# Allegro board SMA_fabB_v1_040718.brd
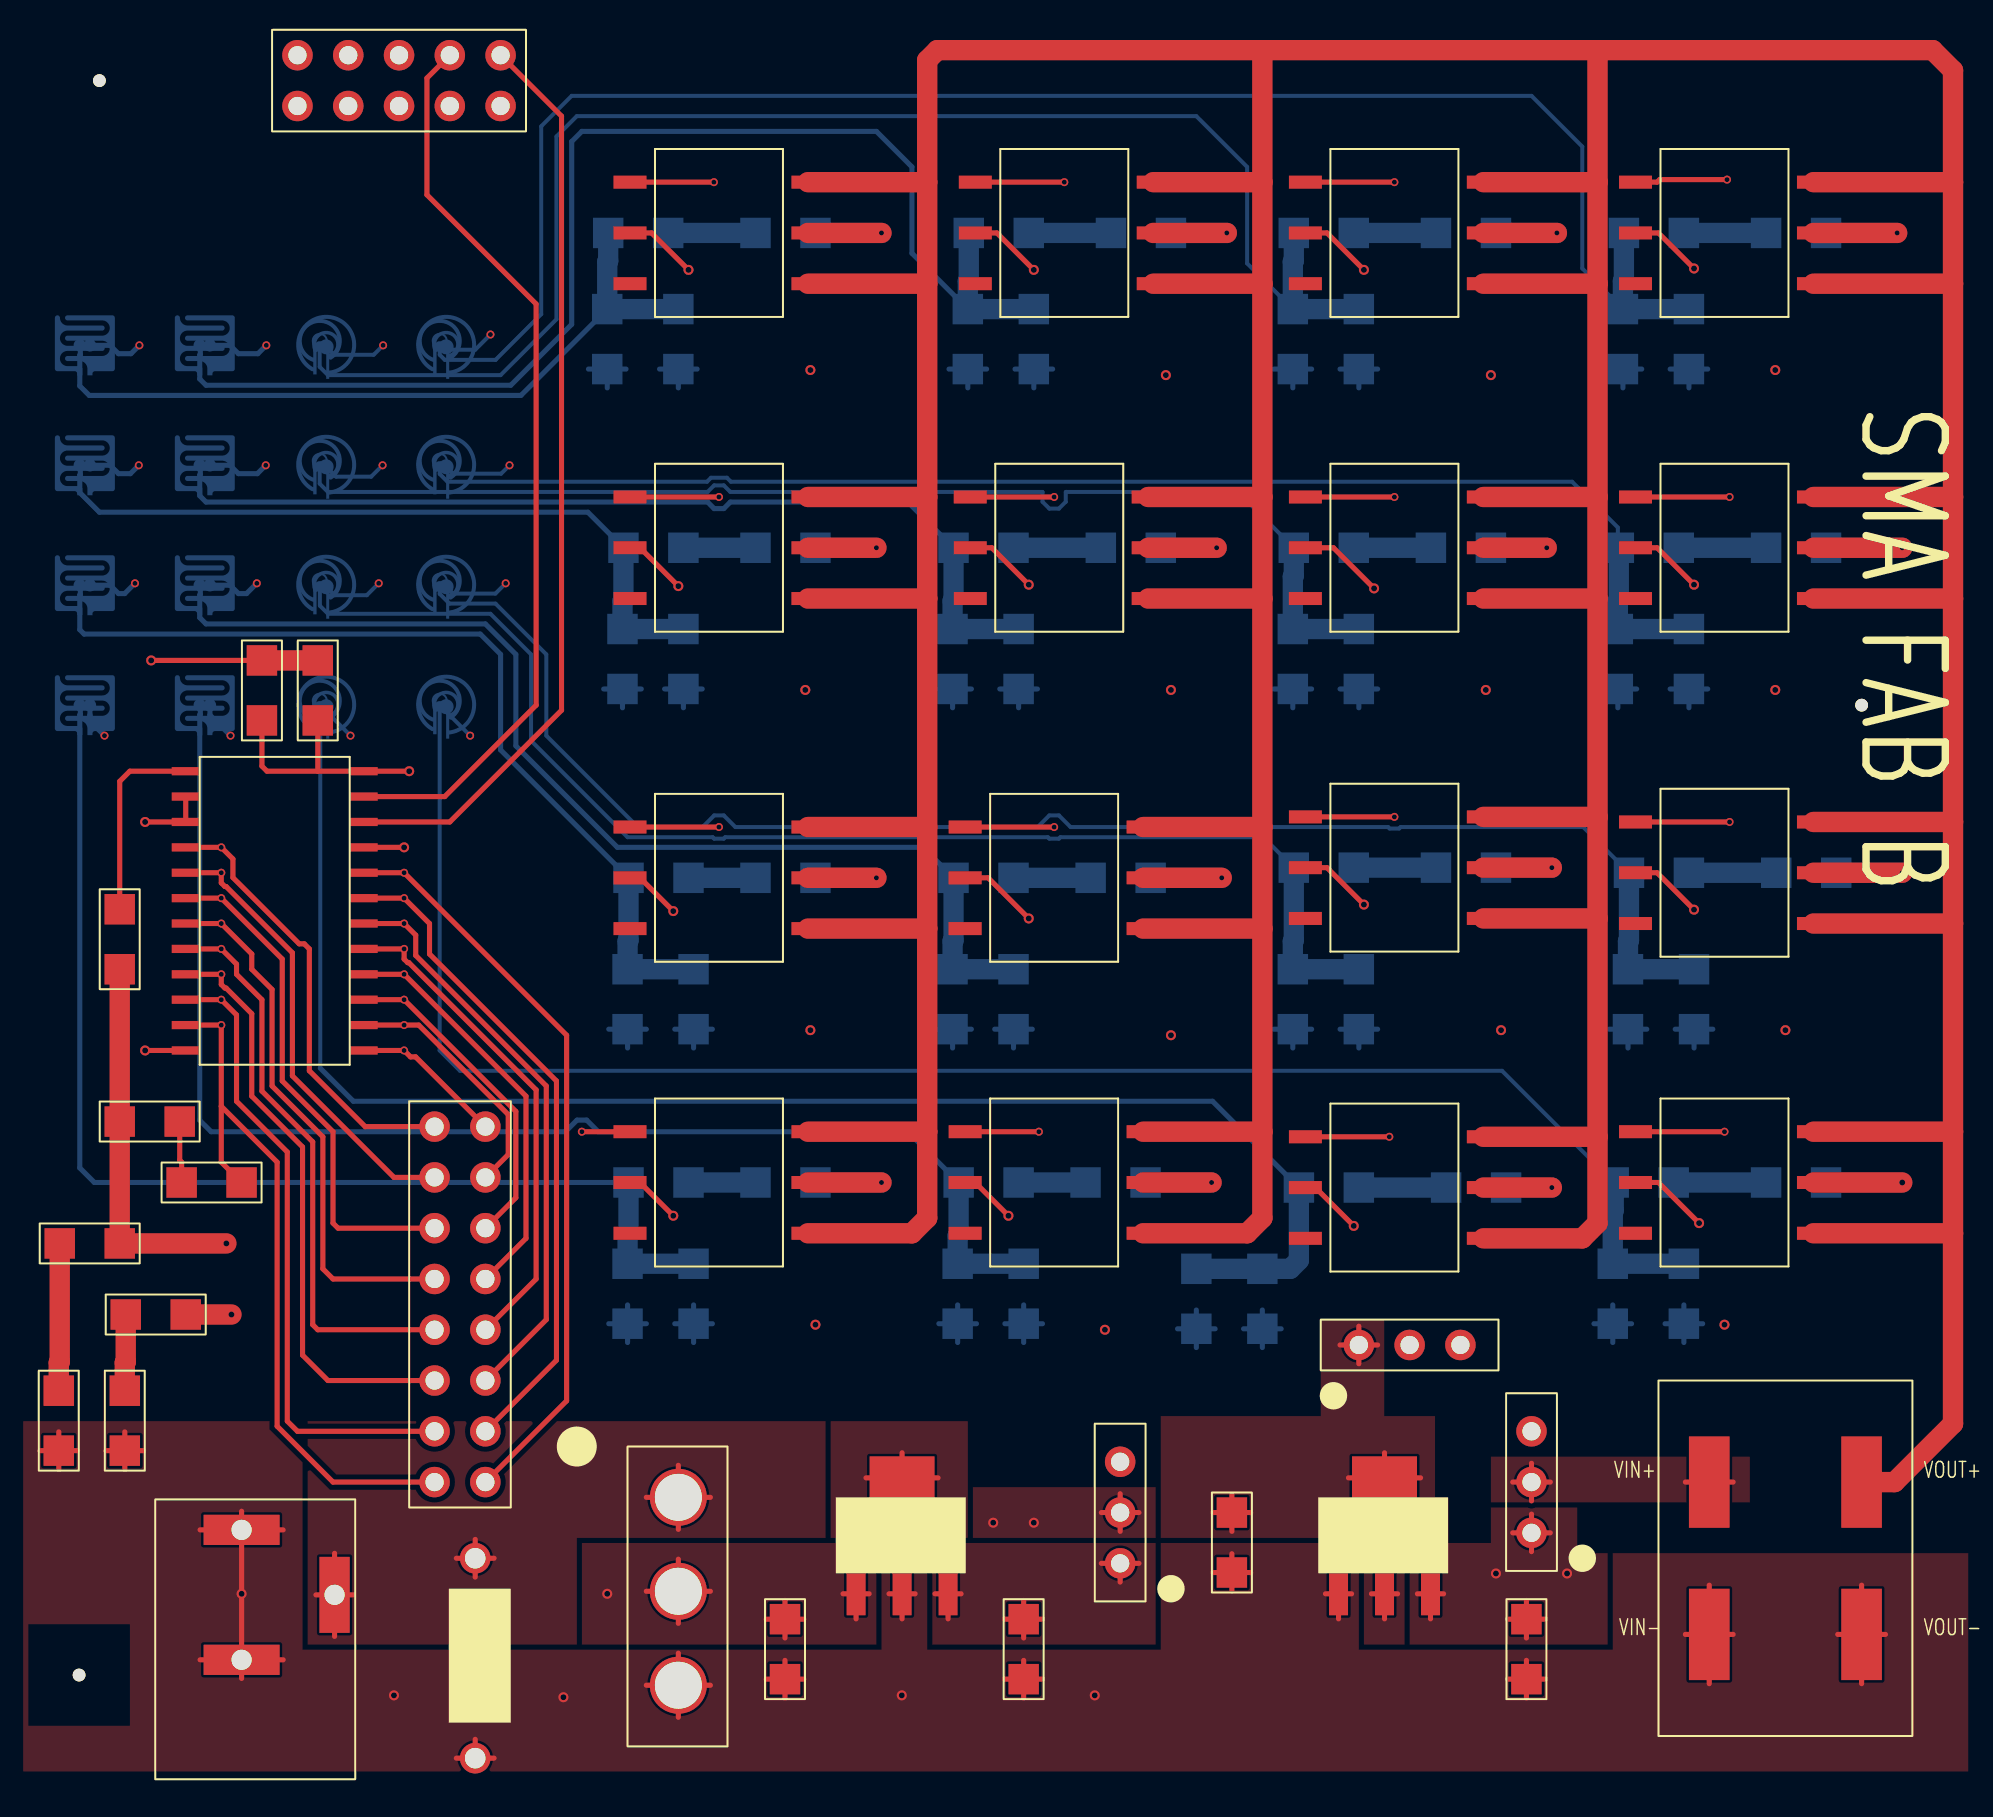
[diagram p0: board, top side]
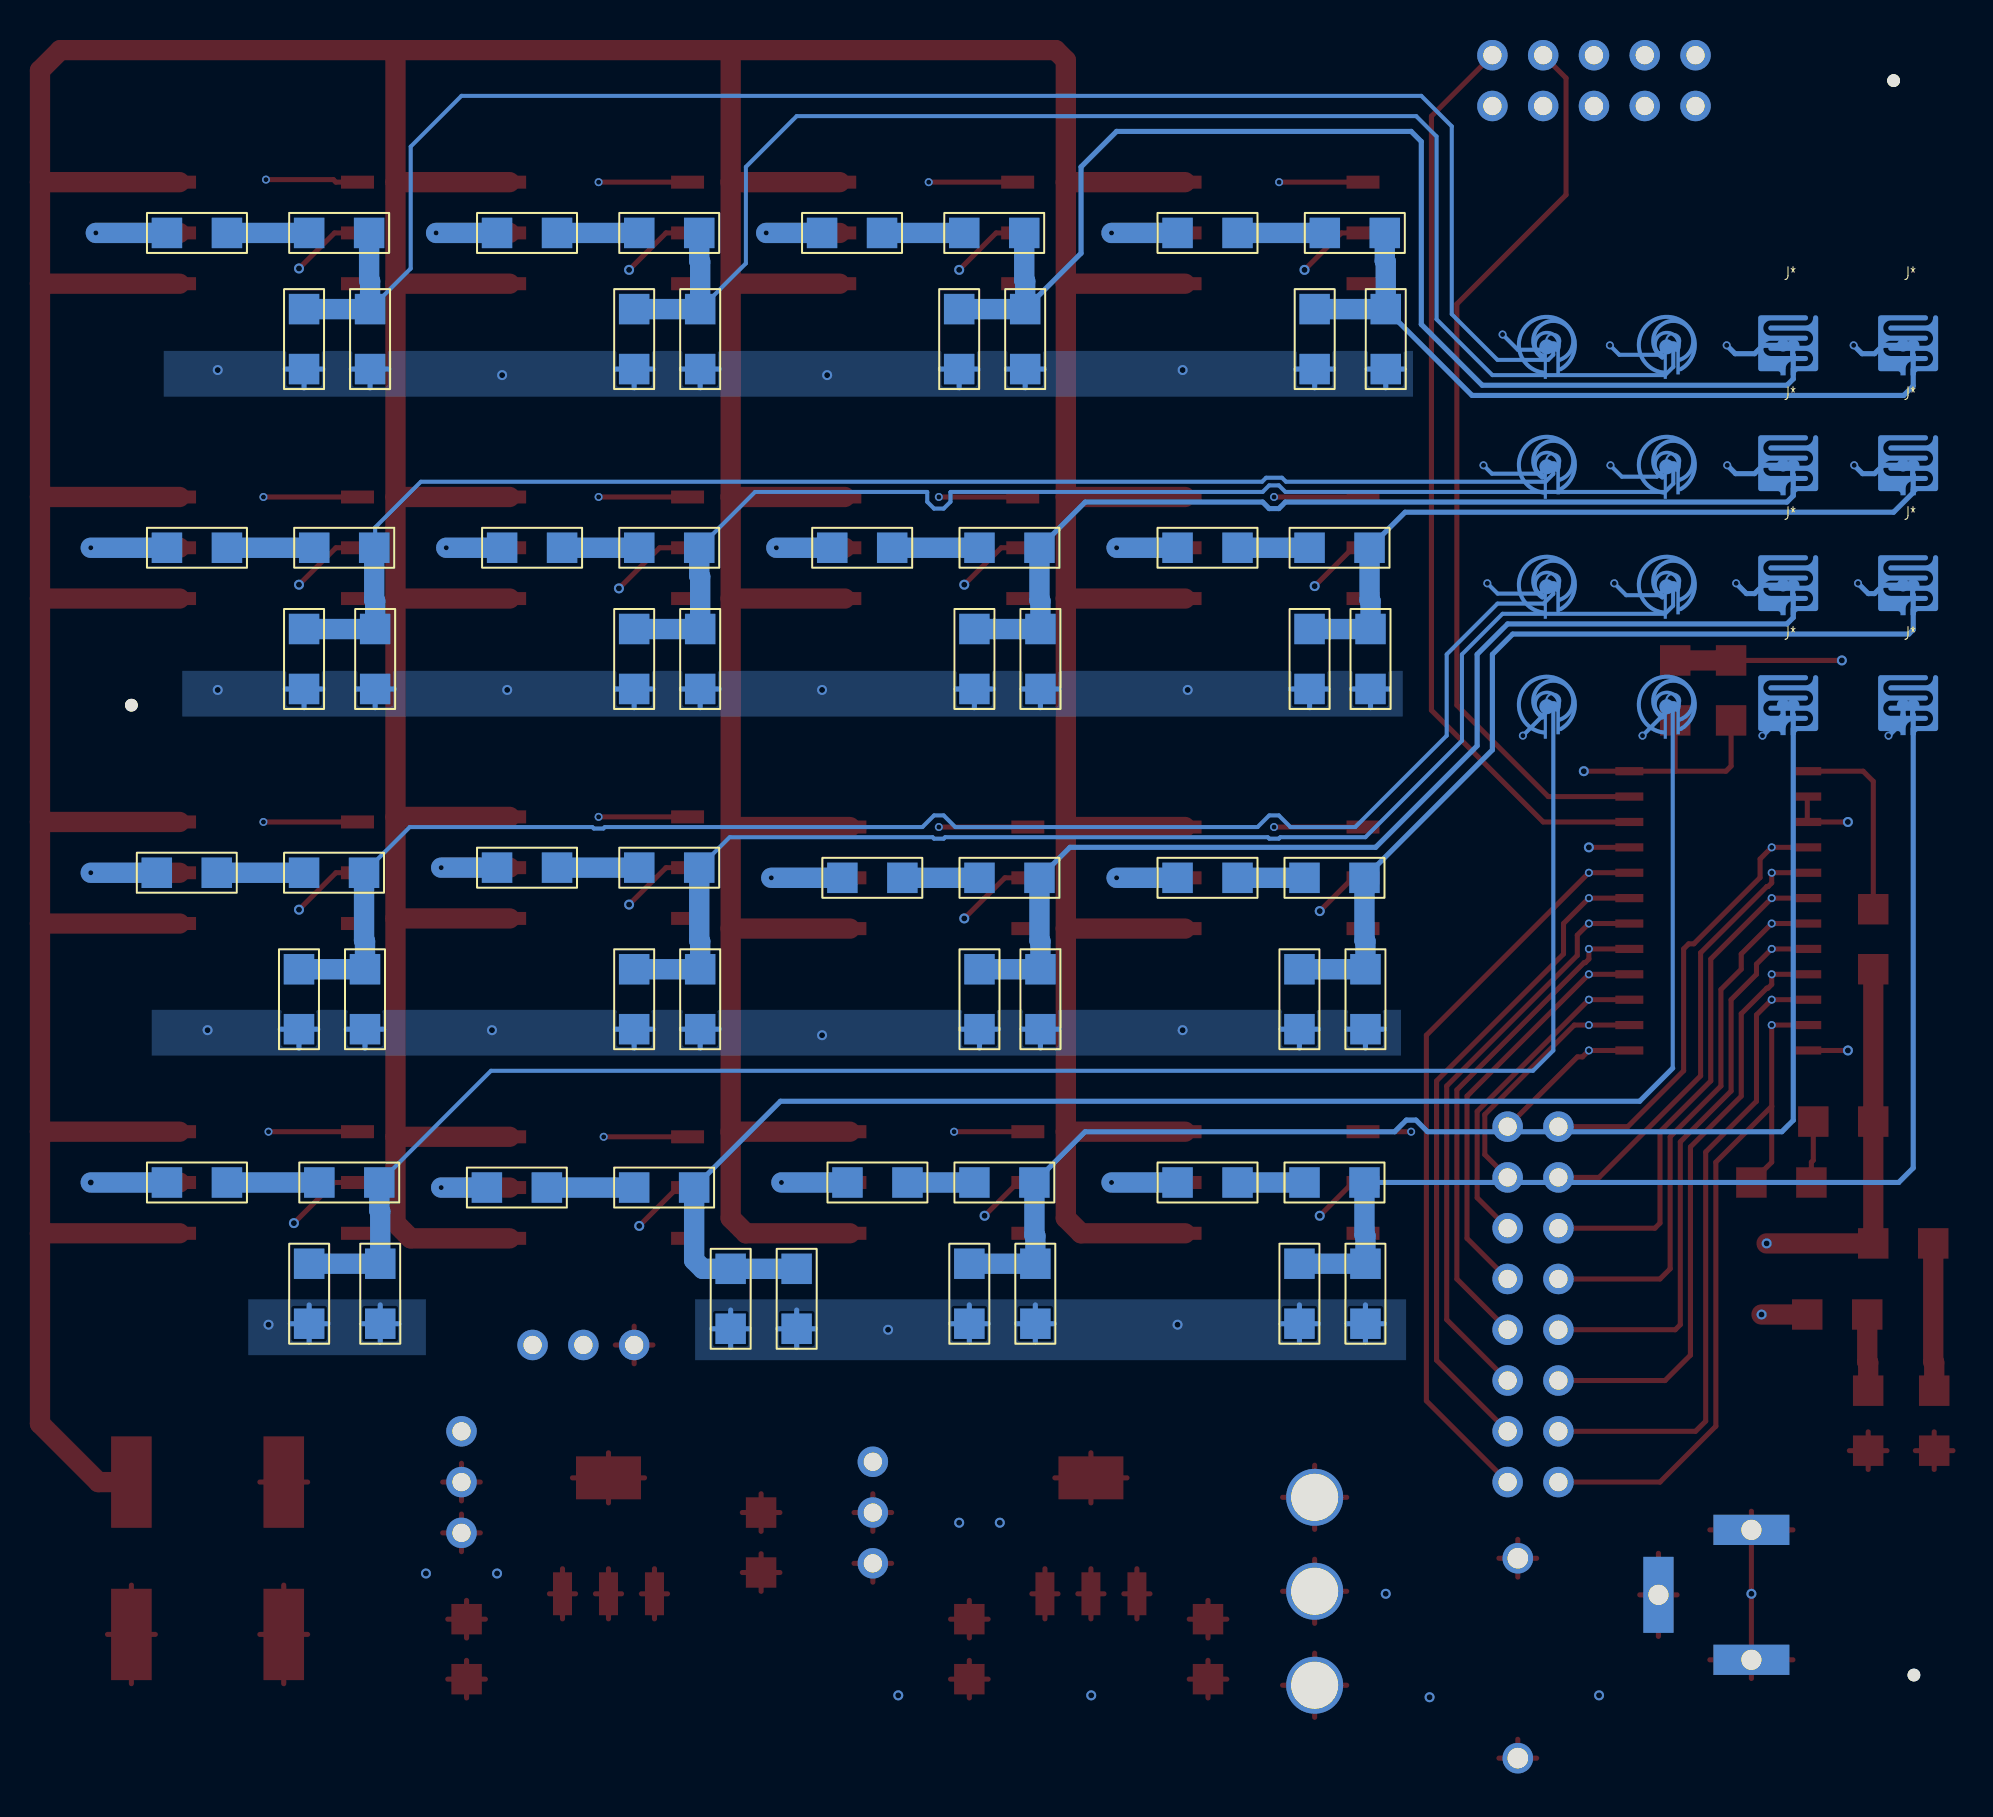
[diagram p1: board, bottom side, seen from below]

No outline. copper layers: TOP, GND, VDD, BOTTOM. Coordinates in mm from the lowest, leftmost part position.

## Design rules (mm)
constraint set DEFAULT: min track width 0.254, pair gap 0.5
net group VSTATIC: nets E0_STAT E1_STAT E2_STAT E3_STAT E4_STAT E5_STAT E6_STAT E7_STAT E8_STAT E9_STAT E10_STAT E11_STAT E12_STAT E13_STAT E14_STAT E15_STAT V_STAT

## Placement (name value [footprint] x y rotation side)
C5  0.33uF  [1206_C]  36.32 2.79 270 top
C6  0.1uF  [1206_C]  48.26 2.79 270 top
C7  1uF  [1206_C]  73.41 2.79 270 top
C8  1uF  [1206_C]  58.67 8.13 270 top
C16  1uF  [1206_C]  12.95 47.75 90 top
C17  0.1uF  [1206_C]  10.16 47.75 90 top
C18  0.1uF  [1206_C]  77.72 20.57 270 bottom
C19  0.1uF  [1206_C]  81.28 20.57 270 bottom
C20  0.1uF  [1206_C]  78.49 35.31 270 bottom
C21  0.1uF  [1206_C]  81.79 35.31 270 bottom
C22  0.1uF  [1206_C]  77.98 52.32 270 bottom
C23  0.1uF  [1206_C]  81.53 52.32 270 bottom
C24  0.1uF  [1206_C]  78.23 68.33 270 bottom
C25  0.1uF  [1206_C]  81.53 68.33 270 bottom
C26  0.1uF  [1206_C]  56.9 20.32 270 bottom
C27  0.1uF  [1206_C]  60.2 20.32 270 bottom
C28  0.1uF  [1206_C]  61.72 35.31 270 bottom
C29  0.1uF  [1206_C]  65.02 35.31 270 bottom
C30  0.1uF  [1206_C]  61.72 52.32 270 bottom
C31  0.1uF  [1206_C]  65.02 52.32 270 bottom
C32  0.1uF  [1206_C]  65.02 68.33 270 bottom
C33  0.1uF  [1206_C]  61.72 68.33 270 bottom
C34  0.1uF  [1206_C]  44.96 20.57 270 bottom
C35  0.1uF  [1206_C]  48.26 20.57 270 bottom
C36  0.1uF  [1206_C]  44.7 35.31 270 bottom
C37  0.1uF  [1206_C]  47.75 35.31 270 bottom
C38  0.1uF  [1206_C]  44.7 52.32 270 bottom
C39  0.1uF  [1206_C]  48.01 52.32 270 bottom
C40  0.1uF  [1206_C]  45.47 68.33 270 bottom
C41  0.1uF  [1206_C]  48.77 68.33 270 bottom
C42  0.1uF  [1206_C]  31.75 20.57 270 bottom
C43  0.1uF  [1206_C]  28.45 20.57 270 bottom
C44  0.1uF  [1206_C]  28.45 35.31 270 bottom
C45  0.1uF  [1206_C]  31.75 35.31 270 bottom
C46  0.1uF  [1206_C]  28.19 52.32 270 bottom
C47  0.1uF  [1206_C]  31.24 52.32 270 bottom
C48  0.1uF  [1206_C]  27.43 68.33 270 bottom
C49  0.1uF  [1206_C]  30.99 68.33 270 bottom
D4  LED  [1206_R]  3.05 27.69 0 top
D5  -  [SA14A]  20.83 5.84 270 top
D6  LED  [1206_R]  6.35 18.03 180 top
D7  LED  [1206_R]  3.05 21.59 180 top
J3  EJ503A_0  [EJ503A]  9.14 7.26 0 top
J14  -  [1103M2S3CQE2]  30.99 8.89 0 top
J15  comb_electrode  [SPIRAL_ELECTRODE_FULL]  19.3 50.04 180 bottom
J16  comb_electrode  [SPIRAL_ELECTRODE_FULL]  19.3 56.04 180 bottom
J17  comb_electrode  [SPIRAL_ELECTRODE_FULL]  19.3 62.04 180 bottom
J18  comb_electrode  [SPIRAL_ELECTRODE_FULL]  19.3 68.04 180 bottom
J19  comb_electrode  [SPIRAL_ELECTRODE_FULL]  13.3 50.04 180 bottom
J20  comb_electrode  [SPIRAL_ELECTRODE_FULL]  13.3 56.04 180 bottom
J21  comb_electrode  [SPIRAL_ELECTRODE_FULL]  13.3 62.04 180 bottom
J22  comb_electrode  [SPIRAL_ELECTRODE_FULL]  13.3 68.04 180 bottom
J23  comb_electrode  [COMB_ELECTRODE_FULL]  7.3 49.53 180 bottom
J24  comb_electrode  [COMB_ELECTRODE_FULL]  7.3 55.53 180 bottom
J25  comb_electrode  [COMB_ELECTRODE_FULL]  7.3 61.53 180 bottom
J26  comb_electrode  [COMB_ELECTRODE_FULL]  7.3 67.53 180 bottom
J27  comb_electrode  [COMB_ELECTRODE_FULL]  1.3 49.53 180 bottom
J28  comb_electrode  [COMB_ELECTRODE_FULL]  1.3 55.53 180 bottom
J29  comb_electrode  [COMB_ELECTRODE_FULL]  1.3 61.53 180 bottom
J30  comb_electrode  [COMB_ELECTRODE_FULL]  1.3 67.53 180 bottom
J31  HDR5x2  [CONN10]  22.1 81.03 180 top
J32  HDR3x1  [CONN3]  73.66 7.11 90 top
J33  HDR3x1  [CONN3]  53.09 5.59 90 top
J34  HDR3x1  [CONN3]  65.02 16.51 0 top
J35  HDR8x2  [CONN16]  18.8 27.43 270 top
NOREF  -  [unnamed]  2.03 79.76 0 top
NOREF#2  -  [unnamed]  1.02 0 0 top
NOREF#3  -  [unnamed]  90.17 48.51 0 top
R12  1k  [1206_R]  3.05 35.31 90 top
R13  1k  [1206_R]  9.14 24.64 180 top
R14  10k  [1206_R]  3.3 14.22 270 top
R15  1k  [1206_R]  0 14.22 270 top
R16  1M  [1206_R]  88.39 24.64 180 bottom
R17  1M  [1206_R]  80.77 24.64 180 bottom
R18  1M  [1206_R]  88.9 40.13 180 bottom
R19  1M  [1206_R]  81.53 40.13 180 bottom
R20  1M  [1206_R]  88.39 56.39 180 bottom
R21  1M  [1206_R]  81.03 56.39 180 bottom
R22  1M  [1206_R]  88.39 72.14 180 bottom
R23  1M  [1206_R]  81.28 72.14 180 bottom
R24  1M  [1206_R]  72.39 24.38 180 bottom
R25  1M  [1206_R]  65.02 24.38 180 bottom
R26  1M  [1206_R]  71.88 40.39 180 bottom
R27  1M  [1206_R]  64.77 40.39 180 bottom
R28  1M  [1206_R]  71.63 56.39 180 bottom
R29  1M  [1206_R]  64.77 56.39 180 bottom
R30  1M  [1206_R]  71.88 72.14 180 bottom
R31  1M  [1206_R]  64.77 72.14 180 bottom
R32  1M  [1206_R]  54.36 24.64 180 bottom
R33  1M  [1206_R]  48.01 24.64 180 bottom
R34  1M  [1206_R]  54.61 39.88 180 bottom
R35  1M  [1206_R]  47.75 39.88 180 bottom
R36  1M  [1206_R]  55.12 56.39 180 bottom
R37  1M  [1206_R]  47.75 56.39 180 bottom
R38  1M  [1206_R]  55.63 72.14 180 bottom
R39  1M  [1206_R]  48.51 72.14 180 bottom
R40  1M  [1206_R]  37.85 24.64 180 bottom
R41  1M  [1206_R]  31.5 24.64 180 bottom
R42  1M  [1206_R]  37.85 39.88 180 bottom
R43  1M  [1206_R]  31.5 39.88 180 bottom
R44  1M  [1206_R]  37.85 56.39 180 bottom
R45  1M  [1206_R]  31.24 56.39 180 bottom
R46  1M  [1206_R]  37.85 72.14 180 bottom
R47  1M  [1206_R]  30.48 72.14 180 bottom
U3  -  [UA78M05CDCY]  39.88 4.06 0 top
U4  TLV1117LV33DCYT_1  [TLV1117LV33DCYT]  64.01 4.06 0 top
U5  -  [B00JVJDEZE]  82.55 7.11 0 top
U8  -  [PCF8575DW]  6.35 45.21 0 top
U9  -  [PLA170]  83.31 24.64 0 top
U10  -  [PLA170]  83.31 40.13 0 top
U11  -  [PLA170]  83.31 56.39 0 top
U12  -  [PLA170]  83.31 72.14 0 top
U13  -  [PLA170]  66.8 24.38 0 top
U14  -  [PLA170]  66.8 40.39 0 top
U15  -  [PLA170]  66.8 56.39 0 top
U16  -  [PLA170]  66.8 72.14 0 top
U17  -  [PLA170]  49.78 24.64 0 top
U18  -  [PLA170]  49.78 39.88 0 top
U19  -  [PLA170]  50.04 56.39 0 top
U20  -  [PLA170]  50.29 72.14 0 top
U21  -  [PLA170]  33.02 24.64 0 top
U22  -  [PLA170]  33.02 39.88 0 top
U23  -  [PLA170]  33.02 56.39 0 top
U24  -  [PLA170]  33.02 72.14 0 top

## Library data of the parts
C5-C8 C16-C49 = CAP
D4 D6 D7 = LED
D5 = SA14A_0
J3 = EJ503A_0
J14 = 1103M2S3CQE2
J15-J30 = comb_electrode_1
J31 = HDR5x2
J32-J34 = HDR3x1
J35 = HDR8x2
R12-R47 = RESISTOR
U3 = UA78M05CDCY_0
U4 = TLV1117LV33DCYT_2
U5 = B00JVJDEZE
U8 = PCF8575DW
U9-U24 = PLA170

## Footprints (pads in the part's own frame, mm; a bottom-side part is the same pattern mirrored in y, then rotated)
1103M2S3CQE2
  round 2.85 hole 2.35: 1(0,0) 2(0,-4.7) 3(0,-9.4)
1206_C
  rect 1.524x1.524 smd: 1(0,0) 2(3,0)
1206_R
  rect 1.524x1.524 smd: 1(0,0) 2(3,0)
B00JVJDEZE
  rect 2.032x4.572 smd: 1(0,2.54) 2(0,-5.08) 3(7.62,2.54) 4(7.62,-5.08)
COMB_ELECTRODE_FULL
  custom 2.492x3 smd: 1(-0.254,-1.016)
  custom 2.491x3 smd: 2(0.254,-1.016)
CONN3
  round 1.524 hole 0.914: 1(0,0) 2(2.54,0) 3(5.08,0)
CONN10
  round 1.524 hole 0.914: 1(0,0) 2(0,2.54) 3(2.54,0) 4(2.54,2.54) 5(5.08,0) 6(5.08,2.54) 7(7.62,0) 8(7.62,2.54) 9(10.16,0) 10(10.16,2.54)
CONN16
  round 1.524 hole 0.914: 1(0,0) 2(0,2.54) 3(2.54,0) 4(2.54,2.54) 5(5.08,0) 6(5.08,2.54) 7(7.62,0) 8(7.62,2.54) 9(10.16,0) 10(10.16,2.54) 11(12.7,0) 12(12.7,2.54) 13(15.24,0) 14(15.24,2.54) 15(17.78,0) 16(17.78,2.54)
EJ503A
  rect 1.51x3.8 hole 1.01: 1(4.65,-3.25)
  rect 3.8x1.51 hole 1.01: 2(0,0) 3(0,-6.5)
PCF8575DW
  rect 1.4x0.41 smd: 1(0,0) 2(0,-1.27) 3(0,-2.54) 4(0,-3.81) 5(0,-5.08) 6(0,-6.35) 7(0,-7.62) 8(0,-8.89) 9(0,-10.16) 10(0,-11.43) 11(0,-12.7) 12(0,-13.97) 13(8.9,-13.97) 14(8.9,-12.7) 15(8.9,-11.43) 16(8.9,-10.16) 17(8.9,-8.89) 18(8.9,-7.62) 19(8.9,-6.35) 20(8.9,-5.08) 21(8.9,-3.81) 22(8.9,-2.54) 23(8.9,-1.27) 24(8.9,0)
PLA170
  rect 1.65x0.65 smd: 1(-4.45,2.54) 2(-4.45,0) 3(-4.45,-2.54) 4(4.45,-2.54) 5(4.45,0) 6(4.45,2.54)
SA14A
  round 1.53 hole 1.03: 1(0,0) 2(10,0)
SPIRAL_ELECTRODE_FULL
  custom 3x3.202 smd: 1(-0.07,-1.6)
  custom 2.2x2.776 smd: 2(0.25,-1.59)
TLV1117LV33DCYT
  rect 0.95x2.15 smd: 1(0,0) 2(2.3,0) 3(4.6,0)
  rect 3.25x2.15 smd: 4(2.3,5.8)
UA78M05CDCY
  rect 0.95x2.15 smd: 1(0,0) 2(2.3,0) 3(4.6,0)
  rect 3.25x2.15 smd: 4(2.3,5.8)
unnamed
  round 0.635 hole 3.175 unplated: (0,0)

## Nets
+3V3: J34.2
+3V3_VR: C8.1 J34.1 U4.2 U4.4(VOUT_TAB)
+5V: C7.1 C16.1 C17.1 D4.1 D7.1 J32.1 J33.2 R12.1 U4.3 U8.24(VCC)
+5V_VR: C6.1 J33.1 U3.3(VOUT)
+12V: C5.1 D6.1 J14.2 U3.1
+12V_SW: D5.1 J3.1 J14.1
GND: C5.2 C6.2 C7.2 C8.2 C16.2 C17.2 C18.2 C19.2 C20.2 C21.2 C22.2 C23.2 C24.2 C25.2 C26.2 C27.2 C28.2 C29.2 C30.2 C31.2 C32.2 C33.2 C34.2 C35.2 C36.2 C37.2 C38.2 C39.2 C40.2 C41.2 C42.2 C43.2 C44.2 C45.2 C46.2 C47.2 C48.2 C49.2 D5.2(-) J3.2(V-) J3.3 J14.3 J15.1(-) J16.1(-) J17.1(-) J18.1(-) J19.1(-) J20.1(-) J21.1(-) J22.1(-) J23.1(-) J24.1(-) J25.1(-) J26.1(-) J27.1(-) J28.1(-) J29.1(-) J30.1(-) J31.2 J31.10 R14.2 R15.2 U3.2 U3.4 U4.1 U5.2 U5.4(VOUT-) U8.2 U8.3 U8.12 U8.21 U9.2 U10.2 U11.2 U12.2 U13.2 U14.2 U15.2 U16.2 U17.2 U18.2 U19.2 U20.2 U21.2 U22.2 U23.2 U24.2
E0_ON: J35.9 U8.8 U9.1
E0_STAT: C18.1 C19.1 J15.2 R17.2
E1_ON: J35.10 U8.17 U11.1
E1_STAT: C22.1 C23.1 J17.2 R21.2
E2_ON: J35.11 U8.9 U13.1
E2_STAT: C26.1 C27.1 J19.2 R25.2
E3_ON: J35.12 U8.18 U15.1
E3_STAT: C30.1 C31.1 J21.2 R29.2
E4_ON: J35.2 U8.13 U10.1
E4_STAT: C20.1 C21.1 J16.2 R19.2
E5_ON: J35.7 U8.7 U12.1
E5_STAT: C24.1 C25.1 J18.2 R23.2
E6_ON: J35.4 U8.14 U14.1
E6_STAT: C28.1 C29.1 J20.2 R27.2
E7_ON: J35.5 U8.6 U16.1
E7_STAT: C32.1 C33.1 J22.2 R31.2
E8_ON: J35.13 U8.10 U17.1
E8_STAT: C34.1 C35.1 J23.2 R33.2
E9_ON: J35.14 U8.19 U19.1
E9_STAT: C38.1 C39.1 J25.2 R37.2
E10_ON: J35.15 R13.1 U8.11 U21.1
E10_STAT: C42.1 C43.1 J27.2 R41.2
E11_ON: J35.16 U8.20 U23.1
E11_STAT: C46.1 C47.1 J29.2 R45.2
E12_ON: J35.6 U8.15 U18.1
E12_STAT: C36.1 C37.1 J24.2 R35.2
E13_ON: J35.3 U8.5 U20.1
E13_STAT: C40.1 C41.1 J26.2 R39.2
E14_ON: J35.8 U8.16 U22.1
E14_STAT: C44.1 C45.1 J28.2 R43.2
E15_ON: J35.1 U8.4 U24.1
E15_STAT: C48.1 C49.1 J30.2 R47.2
I2C_SCL: J31.1 U8.22
I2C_SDA: J31.3 U8.23
V_STAT: U5.3 U9.4 U9.6 U10.4 U10.6 U11.4 U11.6 U12.4 U12.6 U13.4 U13.6 U14.4 U14.6 U15.4 U15.6 U16.4 U16.6 U17.4 U17.6 U18.4 U18.6 U19.4 U19.6 U20.4 U20.6 U21.4 U21.6 U22.4 U22.6 U23.4 U23.6 U24.4 U24.6
VSTAT_IN: J32.2 U5.1
N09716: R12.2 U8.1
N30432: R16.1 U9.5
N30436: R16.2 R17.1
N32192: R18.1 U10.5
N32196: R18.2 R19.1
N32981: R20.1 U11.5
N32985: R20.2 R21.1
N33019: R22.1 U12.5
N33023: R22.2 R23.1
N34350: R24.1 U13.5
N34354: R24.2 R25.1
N34388: R26.1 U14.5
N34392: R26.2 R27.1
N34774: R28.1 U15.5
N34778: R28.2 R29.1
N34812: R30.1 U16.5
N34816: R30.2 R31.1
N38126: R32.1 U17.5
N38130: R32.2 R33.1
N38164: R34.1 U18.5
N38168: R34.2 R35.1
N38546: R36.1 U19.5
N38550: R36.2 R37.1
N38584: R38.1 U20.5
N38588: R38.2 R39.1
N38966: R40.1 U21.5
N38970: R40.2 R41.1
N39004: R42.1 U22.5
N39008: R42.2 R43.1
N39386: R44.1 U23.5
N39390: R44.2 R45.1
N39424: R46.1 U24.5
N39428: R46.2 R47.1
N40772: D6.2(CATHODE) R14.1
N40832: D7.2(CATHODE) R15.1
N51704: D4.2(CATHODE) R13.2

Pads without a net: J31 4 5 6 7 8 9; J32 3; J33 3; J34 3; U9 3; U10 3; U11 3; U12 3; U13 3; U14 3; U15 3; U16 3; U17 3; U18 3; U19 3; U20 3; U21 3; U22 3; U23 3; U24 3

## Via types
v1: diameter 0.4, hole 0.25, TOP to BOTTOM, 63 vias
v2: diameter 0.5, hole 0.3, TOP to BOTTOM, 49 vias

## Routing (per net, layer and track width the routed paths; a pad name or vN(x,y) marks a point on that pad's centre or on a via; arc(x,y) is an arc through that point)
+3V3_VR: length 17.4
  TOP w0.254: 57.73,8.13 C8.1 ; C8.1 58.67,7.19 ; C8.1 58.67,9.07 ; C8.1 59.61,8.13 ; U4.2 66.96,4.06 ; U4.2 65.66,4.06 ; U4.2 66.31,5.32 ; U4.2 66.31,2.81 ; U4.4 66.31,11.12 ; U4.4 68.11,9.86 ; U4.4 66.31,8.61 ; U4.4 64.5,9.86 ; 64.08,16.51 J34.1 ; J34.1 65.96,16.51 ; J34.1 65.02,15.57 ; J34.1 65.02,17.45
+5V: length 53.5
  TOP w0.254: 72.47,2.79 C7.1 ; C7.1 73.41,3.73 ; C7.1 73.41,1.85 ; C7.1 74.35,2.79 ; 52.15,8.13 J33.2 ; J33.2 53.09,9.07 ; J33.2 54.03,8.13 ; J33.2 53.09,7.19 ; 12.95,45.21 10.41,45.21 10.16,45.47 C17.1 ; 12.95,45.21 U8.24 v2(17.53,45.21) ; 12.95,45.21 C16.1 ; J32.1 74.6,7.11 ; J32.1 73.66,6.17 ; J32.1 73.66,8.05 ; J32.1 72.72,7.11 ; 68.61,2.81 U4.3 ; U4.3 68.61,5.32 ; U4.3 67.95,4.06 ; U4.3 69.26,4.06
  TOP w1.016: v2(8.38,21.59) D7.1 D4.1 R12.1
  VDD w0.254: J32.1 74.54,7.11 ; J32.1 73.66,7.99 ; J32.1 73.66,6.24 ; J32.1 72.78,7.11 ; 52.21,8.13 J33.2 ; J33.2 53.09,7.25 ; J33.2 53.09,9 ; J33.2 53.96,8.13
  vias: v2(46.74,7.62) v2(48.77,7.62) v2(71.88,5.08) v2(75.44,5.08)
+5V_VR: length 10.4
  TOP w0.254: 53.09,4.65 J33.1 ; J33.1 54.03,5.59 ; J33.1 52.15,5.59 ; 47.32,2.79 C6.1 ; C6.1 48.26,1.85 ; C6.1 48.26,3.73 ; C6.1 49.2,2.79 ; 43.82,4.06 U3.3 ; U3.3 45.13,4.06 ; U3.3 44.48,2.81 ; U3.3 44.48,5.32
+12V: length 44.9
  TOP w0.254: 35.38,2.79 C5.1 ; C5.1 37.26,2.79 ; C5.1 36.32,3.73 ; C5.1 36.32,1.85 ; U3.1 39.88,5.32 ; U3.1 39.23,4.06 ; U3.1 40.53,4.06 ; U3.1 39.88,2.81 ; 30.99,2.59 J14.2 ; J14.2 32.59,4.19 ; J14.2 29.38,4.19 ; J14.2 30.99,5.79
  TOP w1.016: v2(8.64,18.03) D6.1
  VDD w1.016: v2(27.43,4.06) 27.43,10.92 20.32,18.03 v2(8.64,18.03)
+12V_SW: length 16.2
  TOP w0.254: 29.38,8.89 J14.1 ; J14.1 32.59,8.89 ; J14.1 30.99,7.29 ; J14.1 30.99,10.49 ; J3.1 14.73,4.01 ; J3.1 12.86,4.01 ; J3.1 13.79,6.09 ; J3.1 13.79,1.93 ; D5.1 21.77,5.84 ; D5.1 19.88,5.84 ; D5.1 20.83,4.9 ; D5.1 20.83,6.78
GND: length 320.2
  TOP w0.254: 63.36,4.06 U4.1 ; U4.1 64.01,5.32 ; U4.1 64.01,2.81 ; U4.1 64.66,4.06 ; 90.17,-0.43 U5.4 ; U5.4 88.98,2.03 ; U5.4 90.17,4.5 ; U5.4 91.36,2.03 ; U23.2 29.07,56.39 v2(30.99,54.47) ; C5.2 37.26,-0.21 ; C5.2 36.32,0.73 ; C5.2 35.38,-0.21 ; C5.2 36.32,-1.15 ; U14.2 63.43,40.39 v2(65.28,38.54) ; v2(48.51,54.54) 46.67,56.39 U19.2 ; 81.36,2.03 U5.2 ; U5.2 82.55,4.5 ; U5.2 83.74,2.03 ; U5.2 82.55,-0.43 ; U12.2 80.01,72.14 v2(81.79,70.36) ; v2(64.77,22.47) 62.85,24.38 U13.2 ; U15.2 63.75,56.39 v2(65.79,54.36) ; R14.2 4.24,11.22 ; R14.2 3.3,12.16 ; R14.2 2.36,11.22 ; R14.2 3.3,10.28 ; v2(31.5,70.29) 29.65,72.14 U24.2 ; C6.2 49.2,-0.21 ; C6.2 48.26,0.73 ; C6.2 48.26,-1.15 ; C6.2 47.32,-0.21 ; C8.2 58.67,6.07 ; C8.2 57.73,5.13 ; C8.2 59.61,5.13 ; C8.2 58.67,4.19 ; C7.2 74.35,-0.21 ; C7.2 72.47,-0.21 ; C7.2 73.41,-1.15 ; C7.2 73.41,0.73 ; v2(47.5,22.97) 45.83,24.64 U17.2 ; 42.18,2.81 U3.2 ; U3.2 42.83,4.06 ; U3.2 41.52,4.06 ; U3.2 42.18,5.32 ; U11.2 79.94,56.39 v2(81.79,54.54) ; J3.2 v2(9.14,4.06) J3.3 ; J3.2 11.22,7.26 ; J3.2 9.14,8.19 ; J3.2 7.07,7.26 ; U18.2 46.48,39.88 v2(48.51,37.85) ; J3.3 7.07,0.76 ; J3.3 11.22,0.76 ; J3.3 9.14,-0.17 ; U8.12 v2(4.32,31.24) ; J14.3 30.99,1.09 ; J14.3 32.59,-0.51 ; J14.3 30.99,-2.11 ; J14.3 29.38,-0.51 ; v2(48.77,70.29) 46.92,72.14 U20.2 ; C17.2 v2(4.62,50.75) ; v2(82.04,22.61) 80.01,24.64 U9.2 ; U3.4 43.98,9.86 ; U3.4 40.38,9.86 ; U3.4 42.18,8.61 ; U3.4 42.18,11.12 ; v2(65.28,70.29) 63.43,72.14 U16.2 ; v2(4.32,42.67) U8.3 U8.2 ; U8.21 v2(17.27,41.4) ; 0,10.28 R15.2 ; R15.2 0,12.16 ; R15.2 -0.94,11.22 ; R15.2 0.94,11.22 ; U22.2 29.07,39.88 v2(30.73,38.21) ; 19.88,-4.16 D5.2 ; D5.2 21.77,-4.16 ; D5.2 20.83,-3.22 ; v2(81.79,38.28) 79.94,40.13 U10.2 ; v2(30.73,22.97) 29.07,24.64 U21.2
  TOP w1.016: C16.2 C17.2
  GND w0.254: J3.2 9.14,8.19 ; J3.2 7.07,7.26 ; J3.2 11.22,7.26 ; J3.2 9.14,6.33 ; 19.88,-4.16 D5.2 ; D5.2 20.83,-5.1 ; D5.2 21.77,-4.16 ; D5.2 20.83,-3.22 ; J31.10 12.81,78.49 ; J31.10 11.94,79.36 ; J31.10 11.06,78.49 ; J31.10 11.94,77.61 ; J14.3 30.99,1.09 ; J14.3 30.99,-2.11 ; J14.3 29.38,-0.51 ; J14.3 32.59,-0.51 ; 9.14,-0.17 J3.3 ; J3.3 11.22,0.76 ; J3.3 9.14,1.69 ; J3.3 7.07,0.76 ; J31.2 22.1,79.36 ; J31.2 22.97,78.49 ; J31.2 21.22,78.49 ; J31.2 22.1,77.61
  BOTTOM w0.2: v1(14.59,46.99) 13.41,48.17 13.41,48.39 13.37,48.42 J19.1 ; v1(16.19,60.51) 15.62,59.94 13.87,59.94 J21.1 ; v1(21.59,67.06) 20.83,66.29 19.52,66.29 J18.1 ; v1(16,54.61) 15.41,54.01 13.8,54.01 J20.1 ; J15.1 19.37,48.19 v1(20.57,46.99) ; v1(16.22,66.51) 15.75,66.04 13.77,66.04 J22.1 ; v1(22.54,60.51) 22.13,60.1 19.72,60.1 J17.1 ; v1(22.35,54.61) 21.84,54.1 19.72,54.1 J16.1
  BOTTOM w0.254: 27.51,17.57 C43.2 ; C43.2 28.45,16.63 ; C43.2 28.45,18.51 ; C43.2 29.39,17.57 ; C25.2 82.47,65.33 ; C25.2 80.59,65.33 ; C25.2 81.53,64.39 ; 47.75,31.37 C37.2 ; C37.2 46.81,32.31 ; C37.2 48.69,32.31 ; 47.07,49.32 C39.2 ; C39.2 48.95,49.32 ; C39.2 48.01,48.38 ; 64.08,32.31 C29.2 ; C29.2 65.96,32.31 ; C29.2 65.02,31.37 ; v1(4,60.51) 3.58,60.1 2.99,60.1 2.57,60.51 J29.1 ; J25.1 8.57,60.51 8.99,60.1 9.93,60.1 v1(10.35,60.51) ; 30.05,65.33 C49.2 ; C49.2 31.93,65.33 ; C49.2 30.99,64.39 ; C27.2 61.14,17.32 ; C27.2 59.26,17.32 ; C27.2 60.2,16.38 ; C27.2 60.2,18.26 ; C42.2 31.75,18.51 ; C42.2 30.81,17.57 ; C42.2 32.69,17.57 ; C42.2 31.75,16.63 ; 26.49,65.33 C48.2 ; C48.2 27.43,64.39 ; C48.2 28.37,65.33 ; v1(10.38,66.51) 9.96,66.1 8.99,66.1 8.57,66.51 J26.1 ; C46.2 29.13,49.32 ; C46.2 27.25,49.32 ; C46.2 28.19,48.38 ; C45.2 32.69,32.31 ; C45.2 31.75,31.37 ; C45.2 30.81,32.31 ; 81.53,48.38 C23.2 ; C23.2 80.59,49.32 ; C23.2 82.47,49.32 ; 48.26,16.63 C35.2 ; C35.2 47.32,17.57 ; C35.2 49.2,17.57 ; C35.2 48.26,18.51 ; C18.2 78.66,17.57 ; C18.2 77.72,16.63 ; C18.2 76.78,17.57 ; C18.2 77.72,18.51 ; 47.83,65.33 C41.2 ; C41.2 49.71,65.33 ; C41.2 48.77,64.39 ; 64.08,49.32 C31.2 ; C31.2 65.96,49.32 ; C31.2 65.02,48.38 ; 60.78,49.32 C30.2 ; C30.2 61.72,48.38 ; C30.2 62.66,49.32 ; 44.7,48.38 C38.2 ; C38.2 43.76,49.32 ; C38.2 45.64,49.32 ; J27.1 1.56,48.51 1.56,48.02 1.56,48.02 1.56,47.72 v1(2.29,46.99) ; C21.2 82.73,32.31 ; C21.2 80.85,32.31 ; C21.2 81.79,31.37 ; C24.2 79.17,65.33 ; C24.2 78.23,64.39 ; C24.2 77.29,65.33 ; C19.2 82.22,17.57 ; C19.2 81.28,18.51 ; C19.2 81.28,16.63 ; C19.2 80.34,17.57 ; 55.96,17.32 C26.2 ; C26.2 56.9,18.26 ; C26.2 57.84,17.32 ; C26.2 56.9,16.38 ; 44.53,65.33 C40.2 ; C40.2 45.47,64.39 ; C40.2 46.41,65.33 ; v1(3.81,54.61) 3.3,54.1 2.99,54.1 2.57,54.51 J28.1 ; C44.2 29.39,32.31 ; C44.2 28.45,31.37 ; C44.2 27.51,32.31 ; J23.1 7.56,48.51 7.56,48.02 v1(8.59,46.99) ; 60.78,65.33 C33.2 ; C33.2 62.66,65.33 ; C33.2 61.72,64.39 ; 77.04,49.32 C22.2 ; C22.2 77.98,48.38 ; C22.2 78.92,49.32 ; 77.55,32.31 C20.2 ; C20.2 78.49,31.37 ; C20.2 79.43,32.31 ; 30.3,49.32 C47.2 ; C47.2 31.24,48.38 ; C47.2 32.18,49.32 ; 44.7,31.37 C36.2 ; C36.2 45.64,32.31 ; C36.2 43.76,32.31 ; v1(9.91,54.61) 9.39,54.1 8.99,54.1 8.57,54.51 J24.1 ; C34.2 45.9,17.57 ; C34.2 44.96,18.51 ; C34.2 44.96,16.63 ; C34.2 44.02,17.57 ; C32.2 65.96,65.33 ; C32.2 65.02,64.39 ; C32.2 64.08,65.33 ; C28.2 62.66,32.31 ; C28.2 60.78,32.31 ; C28.2 61.72,31.37 ; v1(4.03,66.51) 3.61,66.1 2.99,66.1 2.57,66.51 J30.1
  vias: v2(16.76,-1.02) v2(25.24,-1.11) v2(37.34,49.28) v2(37.59,65.28) v2(37.59,32.26) v2(37.85,17.53) v2(42.16,-1.02) v2(51.82,-1.02) v2(52.32,17.27) v2(55.37,65.02) v2(55.63,49.28) v2(55.63,32) v2(71.37,49.28) v2(71.63,65.02) v2(72.14,32.26) v2(83.31,17.53) v2(85.85,65.28) v2(85.85,49.28) v2(86.36,32.26)
E0_ON: length 112.4
  TOP w0.254: U8.8 v1(8.13,36.32) 8.89,35.56 8.89,35.05 10.16,33.78 10.16,29.21 12.7,26.67 12.7,17.53 12.95,17.27 J35.9 ; v1(83.31,27.18) U9.1
  VDD w0.254: v1(8.13,36.32) 8.13,35.81 8.31,35.63 8.37,35.63 14.54,29.46 81.03,29.46 v1(83.31,27.18)
E0_STAT: length 86.3
  BOTTOM w0.2: J15.2 19.05,48.44 19.05,31.24 20.07,30.23 72.18,30.23 R17.2
  BOTTOM w1.016: R17.2 77.77,23.24 77.72,23.19 C18.1 C19.1
E1_ON: length 113
  TOP w0.254: J35.10 23.88,19.81 23.88,29.27 17.51,35.63 17.45,35.63 17.27,35.81 v1(17.27,36.32) U8.17 ; v1(83.57,58.93) U11.1
  VDD w0.254: v1(83.57,58.93) 83.57,45.72 82.55,44.7 27.43,44.7 19.05,36.32 v1(17.27,36.32)
E1_STAT: length 69.2
  BOTTOM w0.2: J17.2 19.05,60.08 19.44,59.69 32.42,59.69 32.62,59.89 33.42,59.89 33.62,59.69 75.69,59.69 77.98,57.4 77.98,56.44 R21.2
  BOTTOM w1.016: C23.1 C22.1 77.98,53.72 78.03,53.77 R21.2
E2_ON: length 95.7
  TOP w0.254: U8.9 v1(8.13,35.05) 8.13,34.54 8.31,34.36 8.37,34.36 9.65,33.08 9.65,28.96 12.19,26.42 12.19,16 13.46,14.73 J35.11 ; v1(66.55,26.92) U13.1
  VDD w0.254: v1(66.55,26.92) 64.52,28.96 14.22,28.96 v1(8.13,35.05)
E2_STAT: length 78.5
  BOTTOM w0.2: J19.2 13.08,48.42 13.08,30.36
  BOTTOM w0.254: 13.08,30.36 14.73,28.7 57.71,28.7 R25.2
  BOTTOM w1.016: R25.2 62.02,20.75 61.59,20.32 C27.1 C26.1
E3_ON: length 99.3
  TOP w0.254: U8.18 v1(17.27,37.59) 17.85,37.01 17.85,36 24.38,29.46 24.38,17.78 J35.12 ; v1(66.8,58.93) U15.1
  VDD w0.254: v1(66.8,58.93) 66.8,46.23 66.04,45.47 27.43,45.47 19.56,37.59 v1(17.27,37.59)
E3_STAT: length 59.8
  BOTTOM w0.2: R29.2 58.98,59.18 50.38,59.18 50.36,59.17 50.36,58.69 50.02,58.35 49.54,58.35 49.2,58.69 49.2,59.17 49.19,59.18 33.59,59.18 33.26,59.51 32.78,59.51 32.45,59.18 13.46,59.18 13.05,59.59 13.05,60.44 J21.2
  BOTTOM w1.016: C31.1 C30.1 61.72,54.94 61.77,54.99 R29.2
E4_ON: length 88
  TOP w0.254: U8.13 v1(17.27,31.24) 17.59,30.92 17.85,30.92 J35.2 ; v1(83.57,42.67) U10.1
  VDD w0.254: v1(17.27,31.24) 80.01,31.24 83.57,34.8 v1(83.57,42.67)
E4_STAT: length 77.2
  BOTTOM w0.2: J16.2 19.05,54.08 19.54,53.59 21.84,53.59 24.38,51.05 24.38,46.99 28.96,42.42 32.2,42.42 32.78,43 33.26,43 33.84,42.42 48.96,42.42 49.54,43 50.02,43 50.61,42.42 66.49,42.42 66.56,42.34 67.04,42.34 67.12,42.42 76.25,42.42 R19.2
  BOTTOM w1.016: R19.2 78.53,36.75 78.49,36.7 C20.1 C21.1
E5_ON: length 133.6
  TOP w0.254: J35.7 13.72,19.81 13.21,20.32 13.21,26.92 10.67,29.46 10.67,34.29 9.65,35.31 9.65,36.07 v1(8.13,37.59) U8.7 ; v1(83.44,74.8) 80.07,74.8 79.94,74.68 U12.1
  VDD w0.254: v1(83.44,74.8) 83.44,63.88 80.77,61.21 27.43,61.21 25.91,59.69 25.91,51.31 12.19,37.59 v1(8.13,37.59)
E5_STAT: length 85.8
  BOTTOM w0.2: C24.1 76.2,70.36 76.2,76.45 73.66,78.99 25.65,78.99 24.13,77.47 24.13,68.07 21.84,65.79 19.31,65.79 19.05,66.04 J18.2
  BOTTOM w1.016: C25.1 C24.1 78.23,69.72 78.28,69.77 R23.2
E6_ON: length 76.8
  TOP w0.254: U8.14 v1(17.27,32.51) 18,32.51 22.48,28.04 22.48,26.03 J35.4 ; v1(66.8,42.93) U14.1
  VDD w0.254: v1(17.27,32.51) 17.65,32.89 55.63,32.89 56.01,32.51 65.79,32.51 66.8,33.53 v1(66.8,42.93)
E6_STAT: length 66.2
  BOTTOM w0.2: R27.2 60.25,41.91 50.1,41.91 50.02,41.84 49.54,41.84 49.47,41.91 33.33,41.91 33.26,41.84 32.78,41.84 32.71,41.91 28.45,41.91 23.62,46.74 23.62,51.05 21.59,53.09 13.46,53.09 13.06,53.49 13.06,54.44 J20.2
  BOTTOM w1.016: C29.1 C28.1 61.72,36.7 61.77,36.75 R27.2
E7_ON: length 113.6
  TOP w0.254: J35.5 13.97,22.35 13.72,22.61 13.72,27.18 11.18,29.72 11.18,35.81 v1(8.13,38.86) U8.6 ; v1(66.8,74.68) U16.1
  VDD w0.254: v1(66.8,74.68) 66.8,62.74 66.29,62.23 27.43,62.23 25.15,59.94 25.15,54.61 9.4,38.86 v1(8.13,38.86)
E7_STAT: length 74.5
  BOTTOM w0.2: C33.1 59.44,70.61 59.44,75.44 56.9,77.98 25.91,77.98 24.89,76.96 24.89,67.82 22.1,65.02 13.46,65.02 13.05,65.44 13.05,66.44 J22.2
  BOTTOM w1.016: C32.1 C33.1 61.72,70.69 61.77,70.74 R31.2
E8_ON: length 79.1
  TOP w0.254: v1(49.02,27.18) U17.1 ; U8.10 v1(8.13,33.78) 8.89,33.02 8.89,28.7 11.43,26.16 11.43,12.7 11.94,12.19 J35.13
  VDD w0.254: v1(49.02,27.18) 48.26,27.94 13.97,27.94 v1(8.13,33.78)
E8_STAT: length 67.9
  BOTTOM w0.254: J23.2 7.08,48.49 7.08,48.05 7.05,48.02 7.05,27.75 7.62,27.18 25.34,27.18 25.92,27.76 26.4,27.76 26.98,27.18 42.47,27.18 R33.2
  BOTTOM w1.016: R33.2 45.01,22.02 44.96,21.97 C34.1 C35.1
E9_ON: length 85.2
  TOP w0.254: v1(49.78,58.93) U19.1 ; J35.14 24.89,15.75 24.89,29.72 18.54,36.07 18.54,37.59 v1(17.27,38.86) U8.19
  VDD w0.254: v1(49.78,58.93) 49.78,47.24 49.02,46.48 27.43,46.48 19.81,38.86 v1(17.27,38.86)
E9_STAT: length 48
  BOTTOM w0.254: J25.2 7.08,60.49 7.08,60.05 7.05,60.02 7.05,58.99 7.37,58.67 32.45,58.67 32.78,58.35 33.26,58.35 33.59,58.67 42.47,58.67 R37.2
  BOTTOM w1.016: C39.1 C38.1 44.7,53.72 44.75,53.77 R37.2
E10_ON: length 58.9
  TOP w0.254: 8.13,28.45 v1(8.13,32.51) U8.11 ; 8.13,28.45 8.13,25.65 R13.1 ; 8.13,28.45 10.92,25.65 10.92,12.45 13.72,9.65 J35.15 ; v1(26.16,27.18) U21.1
  VDD w0.254: v1(26.16,27.18) 13.97,27.18 8.64,32.51 v1(8.13,32.51)
E10_STAT: length 58.3
  BOTTOM w0.254: R41.2 1.78,24.64 1.05,25.37 1.05,48.02 1.08,48.05 1.08,48.49 J27.2
  BOTTOM w1.016: R41.2 28.5,22.02 28.45,21.97 C43.1 C42.1
E11_ON: length 71.8
  TOP w0.254: v1(33.02,58.93) U23.1 ; U8.20 v1(17.27,40.13) 25.4,32 25.4,13.72 J35.16
  VDD w0.254: v1(17.27,40.13) 20.32,40.13 27.43,47.24 32,47.24 33.02,48.26 v1(33.02,58.93)
E11_STAT: length 36.9
  BOTTOM w0.254: J29.2 1.08,60.49 1.08,60.05 1.05,60.02 1.05,59.15 2.03,58.17 26.46,58.17 R45.2
  BOTTOM w1.016: R45.2 28.24,53.77 28.19,53.72 C46.1 C47.1
E12_ON: length 61.4
  TOP w0.254: U8.15 v1(17.27,33.78) 22.86,28.19 22.86,23.88 J35.6 ; v1(49.78,42.42) U18.1
  VDD w0.254: v1(17.27,33.78) 48.77,33.78 49.78,34.8 v1(49.78,42.42)
E12_STAT: length 55.1
  BOTTOM w0.254: J24.2 7.08,54.49 7.08,54.05 7.05,54.02 7.05,52.89 7.37,52.58 21.34,52.58 22.86,51.05 22.86,46.48 27.94,41.4 43.23,41.4 R35.2
  BOTTOM w1.016: R35.2 44.75,36.75 44.7,36.7 C36.1 C37.1
E13_ON: length 93.1
  TOP w0.254: J35.3 16.76,24.89 11.68,29.97 11.68,36.13 8.37,39.44 8.31,39.44 8.13,39.62 v1(8.13,40.13) U8.5 ; v1(50.29,74.68) U20.1
  VDD w0.254: v1(50.29,74.68) 50.29,63.75 49.53,62.99 27.18,62.99 24.38,60.2 24.38,54.86 9.65,40.13 v1(8.13,40.13)
E13_STAT: length 64.2
  BOTTOM w0.254: C40.1 42.67,71.12 42.67,75.44 40.89,77.22 26.16,77.22 25.65,76.71 25.65,67.56 22.61,64.52 7.37,64.52 7.05,64.83 7.05,66.03 7.08,66.05 7.08,66.49 J26.2
  BOTTOM w1.016: C41.1 C40.1 45.47,69.72 45.51,69.77 R39.2
E14_ON: length 47.4
  TOP w0.254: U8.16 v1(17.27,35.05) 23.37,28.96 23.37,21.84 J35.8 ; v1(33.02,42.42) U22.1
  VDD w0.254: v1(33.02,42.42) 33.02,36.32 31.75,35.05 v1(17.27,35.05)
E14_STAT: length 45.5
  BOTTOM w0.254: J28.2 1.08,54.49 1.08,54.05 1.05,54.02 1.05,52.29 1.27,52.07 21.08,52.07 22.1,51.05 22.1,46.28 R43.2
  BOTTOM w1.016: R43.2 28.5,36.75 28.45,36.7 C44.1 C45.1
E15_ON: length 74.2
  TOP w0.254: U8.4 v1(8.13,41.4) 8.71,40.82 8.71,39.89 12.02,36.58 12.28,36.58 12.53,36.32 12.53,30.23 15.33,27.43 J35.1 ; v1(32.77,74.68) U24.1
  VDD w0.254: v1(32.77,74.68) 32.77,64.26 32.26,63.75 26.92,63.75 23.62,60.45 23.62,55.06 9.97,41.4 v1(8.13,41.4)
E15_STAT: length 37.8
  BOTTOM w0.254: J30.2 1.08,66.49 1.08,66.05 1.05,66.03 1.05,64.48 1.52,64.01 23.11,64.01 C48.1
  BOTTOM w1.016: C49.1 C48.1 27.43,70.69 27.48,70.74 R47.2
I2C_SCL: length 46.2
  TOP w0.254: J31.1 25.15,77.98 25.15,48.26 19.56,42.67 U8.22
I2C_SDA: length 45.8
  TOP w0.254: J31.3 18.41,79.88 18.41,74.04 23.88,68.58 23.88,48.51 19.3,43.94 U8.23
V_STAT: length 496.8
  TOP w1.016: U23.6 43.43,58.93 ; 43.43,58.93 43.43,69.6 ; 43.43,58.93 43.43,53.85 ; 60.2,74.68 60.2,81.28 ; 60.2,74.68 60.2,69.6 ; 60.2,74.68 U20.6 ; 60.2,81.28 43.94,81.28 43.43,80.77 43.43,74.68 ; 60.2,81.28 76.96,81.28 ; 60.2,27.18 60.2,22.86 59.44,22.1 U17.4 ; 60.2,27.18 U17.6 ; 60.2,27.18 60.2,37.34 ; U15.6 76.96,58.93 ; 76.96,58.93 76.96,69.6 ; 76.96,58.93 76.96,53.85 ; 43.43,69.6 43.43,74.68 ; 43.43,69.6 U24.4 ; 43.43,74.68 U24.6 ; 76.96,69.6 76.96,74.68 ; 76.96,69.6 U16.4 ; 76.96,74.68 76.96,81.28 ; 76.96,74.68 U16.6 ; U19.4 60.2,53.85 ; 60.2,53.85 60.2,58.93 ; 60.2,53.85 60.2,42.42 ; 94.74,74.68 94.74,80.26 93.73,81.28 76.96,81.28 ; 94.74,74.68 94.74,69.6 ; 94.74,74.68 U12.6 ; U11.4 94.74,53.85 ; 94.74,53.85 94.74,42.67 ; 94.74,53.85 94.74,58.93 ; U10.4 94.74,37.59 ; 94.74,37.59 94.74,42.67 ; 94.74,37.59 94.74,27.18 ; 94.74,42.67 U10.6 ; U9.4 94.74,22.1 ; 94.74,22.1 94.74,12.57 91.82,9.65 U5.3 ; 94.74,22.1 94.74,27.18 ; 94.74,27.18 U9.6 ; U14.6 76.96,42.93 ; 76.96,42.93 76.96,53.85 ; 76.96,42.93 76.96,37.85 ; U19.6 60.2,58.93 ; 60.2,58.93 60.2,69.6 ; U22.4 43.43,37.34 ; 43.43,37.34 43.43,27.18 ; 43.43,37.34 43.43,42.42 ; 76.96,26.92 76.96,22.61 76.2,21.84 U13.4 ; 76.96,26.92 76.96,37.85 ; 76.96,26.92 U13.6 ; 60.2,69.6 U20.4 ; 43.43,42.42 43.43,53.85 ; 43.43,42.42 U22.6 ; 43.43,53.85 U23.4 ; 76.96,53.85 U15.4 ; U11.6 94.74,58.93 ; 94.74,58.93 94.74,69.6 ; 76.96,37.85 U14.4 ; 94.74,69.6 U12.4 ; 43.43,27.18 43.43,22.86 42.67,22.1 U21.4 ; 43.43,27.18 U21.6 ; 60.2,42.42 U18.6 ; 60.2,42.42 60.2,37.34 ; U18.4 60.2,37.34
VSTAT_IN: length 6.1
  TOP w0.254: J32.2 74.6,9.65 ; J32.2 72.72,9.65 ; J32.2 73.66,8.71 ; J32.2 73.66,10.59 ; 83.74,9.65 U5.1 81.36,9.65
N09716: length 9.9
  TOP w0.254: R12.2 3.05,44.7 3.56,45.21 U8.1
N30432: length 8.2
  TOP w1.016: U9.5 v2(92.2,24.64)
  BOTTOM w1.016: R16.1 v2(92.2,24.64)
N30436: length 4.6
  BOTTOM w1.016: R17.1 R16.2
N32192: length 7.7
  TOP w1.016: U10.5 v1(92.2,40.13)
  BOTTOM w1.016: v1(92.2,40.13) R18.1
N32196: length 4.4
  BOTTOM w1.016: R18.2 R19.1
N32981: length 8.2
  TOP w1.016: U11.5 v1(92.2,56.39)
  BOTTOM w1.016: R20.1 v1(92.2,56.39)
N32985: length 4.4
  BOTTOM w1.016: R21.1 R20.2
N33019: length 7.7
  TOP w1.016: U12.5 v1(91.95,72.14)
  BOTTOM w1.016: v1(91.95,72.14) R22.1
N33023: length 4.1
  BOTTOM w1.016: R22.2 R23.1
N34350: length 5.7
  TOP w1.016: U13.5 v1(74.68,24.38)
  BOTTOM w1.016: R24.1 v1(74.68,24.38)
N34354: length 4.4
  BOTTOM w1.016: R25.1 R24.2
N34388: length 6.2
  TOP w1.016: U14.5 v1(74.68,40.39)
  BOTTOM w1.016: v1(74.68,40.39) R26.1
N34392: length 4.1
  BOTTOM w1.016: R26.2 R27.1
N34774: length 6
  TOP w1.016: U15.5 v1(74.42,56.39)
  BOTTOM w1.016: v1(74.42,56.39) R28.1
N34778: length 3.9
  BOTTOM w1.016: R28.2 R29.1
N34812: length 6.7
  TOP w1.016: U16.5 v1(74.93,72.14)
  BOTTOM w1.016: v1(74.93,72.14) R30.1
N34816: length 4.1
  BOTTOM w1.016: R30.2 R31.1
N38126: length 6.7
  TOP w1.016: U17.5 v1(57.66,24.64)
  BOTTOM w1.016: R32.1 v1(57.66,24.64)
N38130: length 3.4
  BOTTOM w1.016: R33.1 R32.2
N38164: length 7.5
  TOP w1.016: U18.5 v1(58.17,39.88)
  BOTTOM w1.016: R34.1 v1(58.17,39.88)
N38168: length 3.9
  BOTTOM w1.016: R34.2 R35.1
N38546: length 6.2
  TOP w1.016: U19.5 v1(57.91,56.39)
  BOTTOM w1.016: R36.1 v1(57.91,56.39)
N38550: length 4.4
  BOTTOM w1.016: R36.2 R37.1
N38584: length 6.5
  TOP w1.016: U20.5 v1(58.42,72.14)
  BOTTOM w1.016: v1(58.42,72.14) R38.1
N38588: length 4.1
  BOTTOM w1.016: R38.2 R39.1
N38966: length 7
  TOP w1.016: U21.5 v1(41.15,24.64)
  BOTTOM w1.016: R40.1 v1(41.15,24.64)
N38970: length 3.3
  BOTTOM w1.016: R40.2 R41.1
N39004: length 6.5
  TOP w1.016: U22.5 v1(40.89,39.88)
  BOTTOM w1.016: v1(40.89,39.88) R42.1
N39008: length 3.3
  BOTTOM w1.016: R42.2 R43.1
N39386: length 6.5
  TOP w1.016: U23.5 v1(40.89,56.39)
  BOTTOM w1.016: v1(40.89,56.39) R44.1
N39390: length 3.6
  BOTTOM w1.016: R44.2 R45.1
N39424: length 7
  TOP w1.016: U24.5 v1(41.15,72.14)
  BOTTOM w1.016: R46.1 v1(41.15,72.14)
N39428: length 4.4
  BOTTOM w1.016: R46.2 R47.1
N40772: length 3.8
  TOP w1.016: R14.1 3.3,15.62 3.35,15.67 D6.2
N40832: length 7.4
  TOP w1.016: D7.2 0.05,15.67 0,15.62 R15.1
N51704: length 3.1
  TOP w0.254: R13.2 6.14,25.65 6.05,25.75 D4.2

## Copper pours and planes (outline as drawn; the poured copper is in the pictures)
+3V3_VR on TOP: 65.28,1.52 65.28,6.86 55.12,6.86 55.12,12.95 63.12,12.95 63.12,17.78 66.29,17.78 66.29,12.95 68.83,12.95 68.83,6.86 67.31,6.86 67.31,1.52
+5V on TOP: 67.56,1.52 67.56,6.6 71.63,6.6 71.63,8.38 75.95,8.38 75.95,6.1 77.47,6.1 77.47,1.52
+5V on TOP: 54.86,6.86 54.86,9.4 45.72,9.4 45.72,6.86
+5V on VDD: -3.3,-5.32 -3.3,85.34 96.7,85.34 96.7,-5.32
+5V_VR on TOP: 43.69,1.52 43.69,6.6 54.86,6.6 54.86,1.52
+12V on TOP: 26.16,6.6 26.16,1.52 40.89,1.52 40.89,6.6
+12V_SW on TOP: 12.45,1.52 12.45,12.7 38.35,12.7 38.35,6.86 25.91,6.86 25.91,1.52
GND on TOP: -1.78,-4.83 -1.78,12.7 12.19,12.7 12.19,1.27 41.15,1.27 41.15,6.86 38.61,6.86 38.61,12.7 45.47,12.7 45.47,6.86 43.43,6.86 43.43,1.27 55.12,1.27 55.12,6.6 65.02,6.6 65.02,1.27 77.72,1.27 77.72,6.1 95.5,6.1 95.5,-4.83
GND on BOTTOM: 75.44,18.8 75.44,16 84.33,16 84.33,18.8
GND on BOTTOM: 26.67,33.27 26.67,30.99 89.15,30.99 89.15,33.27
GND on BOTTOM: 26.58,50.23 26.58,47.95 89.06,47.95 89.06,50.23
GND on BOTTOM: 26.42,18.8 26.42,15.75 61.98,15.75 61.98,18.8
GND on BOTTOM: 26.07,66.23 26.07,63.95 88.55,63.95 88.55,66.23
GND on GND: -3.3,-5.17 -3.3,85.34 96.7,85.34 96.7,-5.17
VSTAT_IN on TOP: 71.63,8.64 71.63,10.92 84.58,10.92 84.58,8.64

## Text on the board
User.Comments: 04/01/18 | DATE | 0.1 | REV | FAB B RELEASE | DESCRIPTION | AUTHOR | zq2154 | SMA | CREATIVE MACHINES LAB | B
Ref Des/Silkscreen Top: SMA FAB B
XSECTION_CHART: *  SURFACE | L1 TOP CONDUCTOR | *  DIELECTRIC | L2 GND CONDUCTOR | L3 VDD CONDUCTOR | L4 BOTTOM CONDUCTOR | DESIGN CROSS SECTION CHART | ___________________________ | TOTAL THICKNESS 0.73152 MM | 1-4
PAGE_OUTLINE: Materials provided to you regarding Creative Machines Lab's | product designs are confidential and considered intellectual | property. They may not be shared without our permission. | COMPANY: | TITLE: | CONFIDENTIALITY REMINDER: | FAB:
NCLEGEND-1-4: FIGURE | FINISHED_SIZE | 0.25 | 0.3 | 0.9144 | 1.01 | 1.03 | 2.35 | 3.175 | TOLERANCE_DRILL | +0.005/-0.005 | +0.01/-0.01 | +0.0/-0.0 | +0.1/-0.1 | DRILL CHART: TOP to BOTTOM | ALL UNITS ARE IN MILLIMETERS | TOLERANCE_TRAVEL | - | PLATED | NON-PLATED | QTY | 63 | 49 | 35 | 1 | 2 | 3 | 158 | TOTAL HOLES:
